# EAGLE board LPS22HB_pcb_pan (EAGLE 8.2.2), part 1 of 3
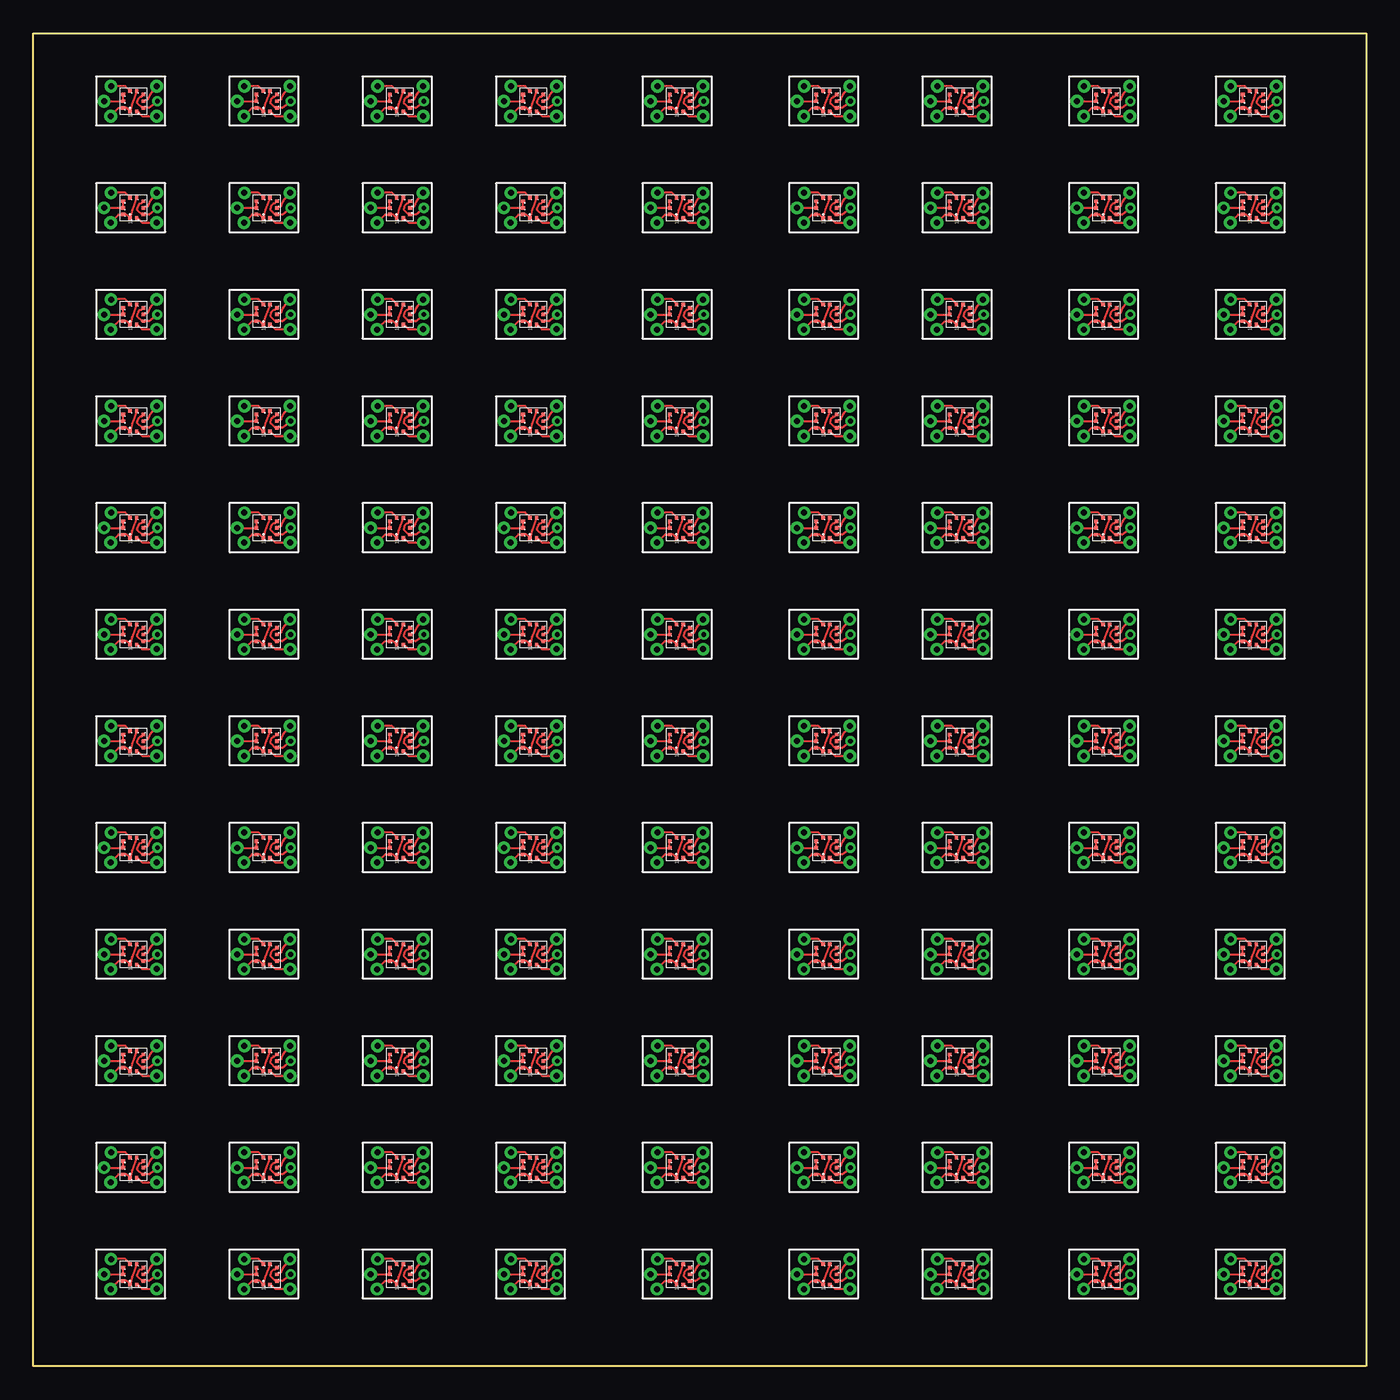
[diagram p0: board, top side]
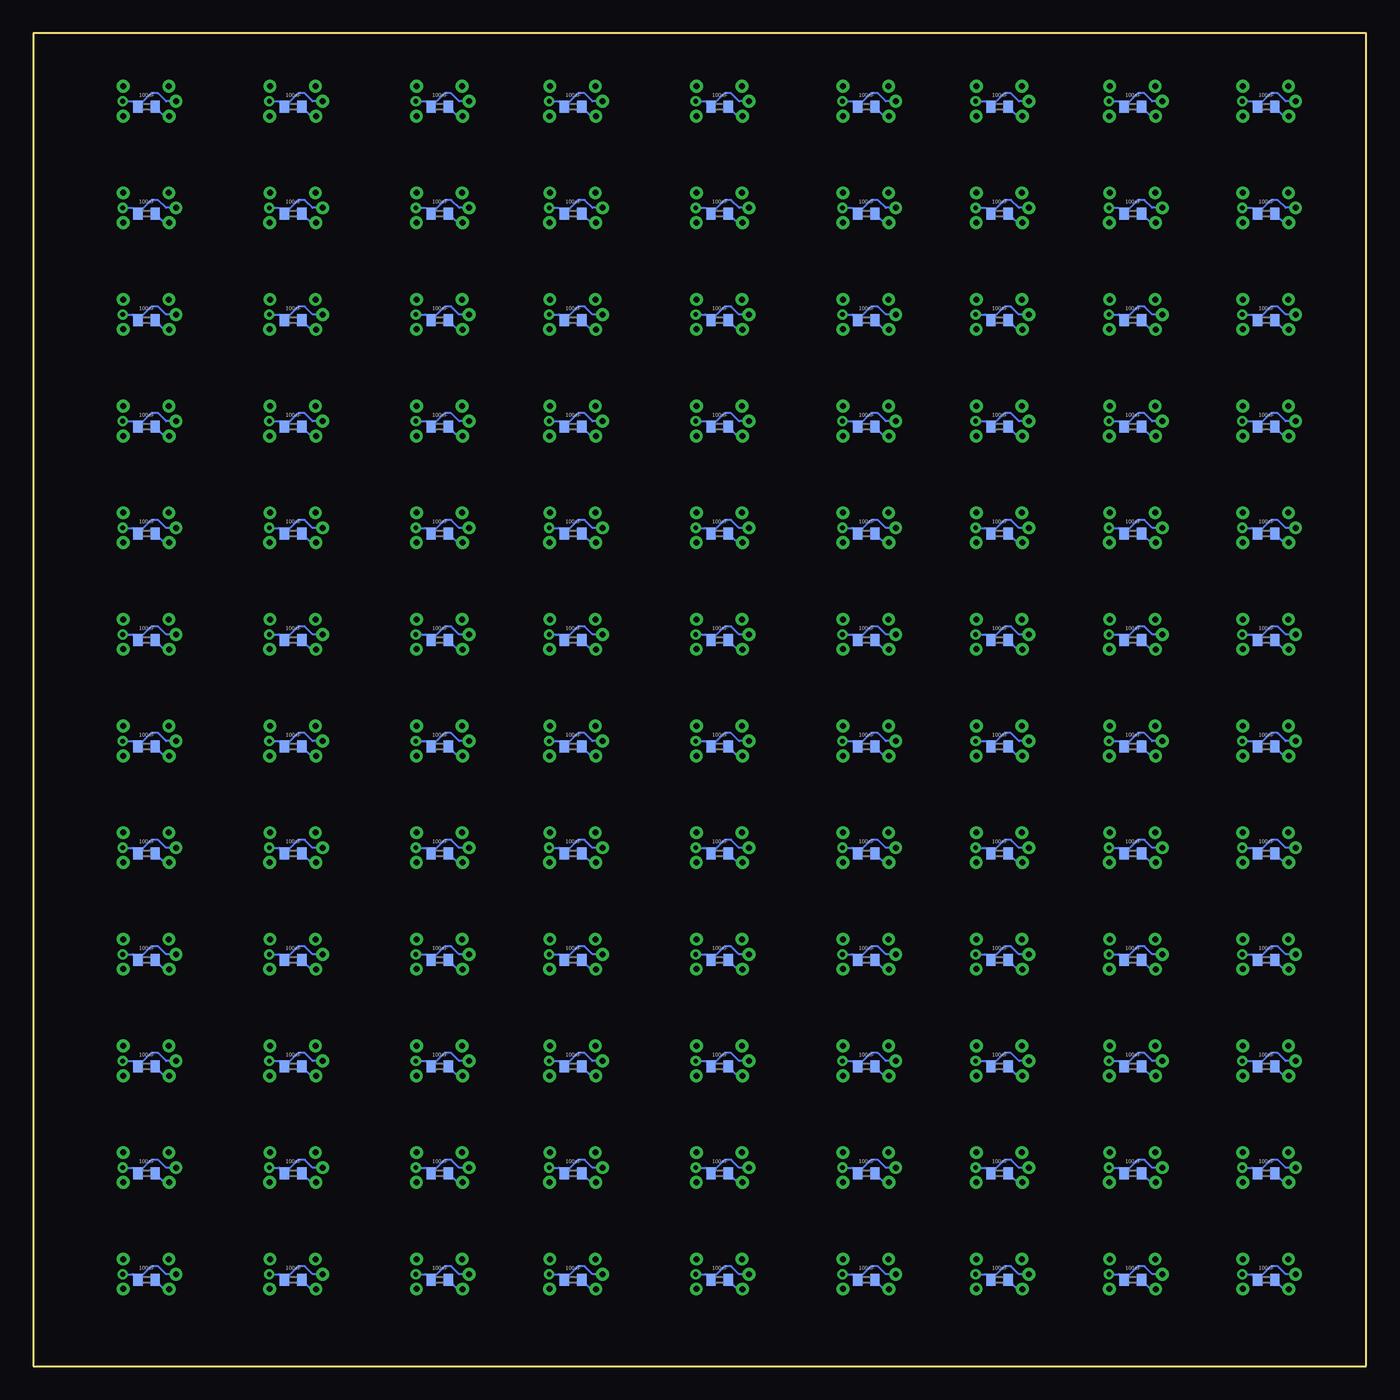
[diagram p1: board, bottom side, seen from below]

Size 100 x 100 mm. Coordinates in mm from the lower left corner, seen from the top.
Outline: 0,0 0,100 100,100 100,0 0,0
Copper layers (1*16): Top 0.035mm / dielectric 1.5mm / Bottom 0.035mm
Design rules "default": minimum track width 6mil, minimum drill 0.35mm, track to track 6mil, track to pad 6mil, pad to pad 6mil, via to via 6mil, smd to smd 6mil, copper to edge 40mil, drill to drill 6mil, minimum pad ring 10mil, minimum via ring 8mil, stop-mask expansion 4mil, vias tented up to drill 0mil, thermal gap 10mil

## Footprints (pad centres in the part's own frame; a part is rotated, then mirrored left to right if it is on the bottom)
C0402 = smd 0.7 x 0.9: 1 -0.65,0; 2 0.65,0
LPS22HB_HLGA = smd 0.275 x 0.25: P$1 0.762,-0.25; P$2 0.762,0.25; P$6 -0.762,0.25; P$7 -0.762,-0.25 | smd 0.25 x 0.275: P$3 0.5,0.762; P$4 0,0.762; P$5 -0.5,0.762; P$8 -0.5,-0.762; P$9 0,-0.762; P$10 0.5,-0.762
WIREPAD_0,8/0,45 = drill 0.45 pad 0.71: P$1 0,0

## Placement (x,y rotation side)
C1  100nF  [C0402]  7.51,14.48 180 bottom
C2  100nF  [C0402]  7.51,6.48 180 bottom
C3  100nF  [C0402]  7.51,22.48 180 bottom
C4  100nF  [C0402]  7.51,30.48 180 bottom
C5  100nF  [C0402]  7.51,38.48 180 bottom
C6  100nF  [C0402]  7.51,46.48 180 bottom
C7  100nF  [C0402]  7.51,54.48 180 bottom
C8  100nF  [C0402]  7.51,62.48 180 bottom
C9  100nF  [C0402]  7.51,70.48 180 bottom
C10  100nF  [C0402]  7.51,78.48 180 bottom
C11  100nF  [C0402]  7.51,86.48 180 bottom
C12  100nF  [C0402]  7.51,94.48 180 bottom
C13  100nF  [C0402]  17.51,6.48 180 bottom
C14  100nF  [C0402]  17.51,14.48 180 bottom
C15  100nF  [C0402]  17.51,22.48 180 bottom
C16  100nF  [C0402]  17.51,30.48 180 bottom
C17  100nF  [C0402]  17.51,38.48 180 bottom
C18  100nF  [C0402]  17.51,46.48 180 bottom
C19  100nF  [C0402]  17.51,54.48 180 bottom
C20  100nF  [C0402]  17.51,62.48 180 bottom
C21  100nF  [C0402]  17.51,70.48 180 bottom
C22  100nF  [C0402]  17.51,78.48 180 bottom
C23  100nF  [C0402]  17.51,86.48 180 bottom
C24  100nF  [C0402]  17.51,94.48 180 bottom
C25  100nF  [C0402]  27.51,6.48 180 bottom
C26  100nF  [C0402]  27.51,14.48 180 bottom
C27  100nF  [C0402]  27.51,22.48 180 bottom
C28  100nF  [C0402]  27.51,30.48 180 bottom
C29  100nF  [C0402]  27.51,38.48 180 bottom
C30  100nF  [C0402]  27.51,46.48 180 bottom
C31  100nF  [C0402]  27.51,54.48 180 bottom
C32  100nF  [C0402]  27.51,62.48 180 bottom
C33  100nF  [C0402]  27.51,70.48 180 bottom
C34  100nF  [C0402]  27.51,78.48 180 bottom
C35  100nF  [C0402]  27.51,86.48 180 bottom
C36  100nF  [C0402]  27.51,94.48 180 bottom
C37  100nF  [C0402]  37.51,6.48 180 bottom
C38  100nF  [C0402]  37.51,14.48 180 bottom
C39  100nF  [C0402]  37.51,22.48 180 bottom
C40  100nF  [C0402]  37.51,30.48 180 bottom
C41  100nF  [C0402]  37.51,38.48 180 bottom
C42  100nF  [C0402]  37.51,46.48 180 bottom
C43  100nF  [C0402]  37.51,54.48 180 bottom
C44  100nF  [C0402]  37.51,62.48 180 bottom
C45  100nF  [C0402]  37.51,70.48 180 bottom
C46  100nF  [C0402]  37.51,78.48 180 bottom
C47  100nF  [C0402]  37.51,86.48 180 bottom
C48  100nF  [C0402]  37.51,94.48 180 bottom
C49  100nF  [C0402]  48.51,6.48 180 bottom
C50  100nF  [C0402]  48.51,14.48 180 bottom
C51  100nF  [C0402]  48.51,22.48 180 bottom
C52  100nF  [C0402]  48.51,30.48 180 bottom
C53  100nF  [C0402]  48.51,38.48 180 bottom
C54  100nF  [C0402]  48.51,46.48 180 bottom
C55  100nF  [C0402]  48.51,54.48 180 bottom
C56  100nF  [C0402]  48.51,62.48 180 bottom
C57  100nF  [C0402]  48.51,70.48 180 bottom
C58  100nF  [C0402]  48.51,78.48 180 bottom
C59  100nF  [C0402]  48.51,86.48 180 bottom
C60  100nF  [C0402]  48.51,94.48 180 bottom
C61  100nF  [C0402]  59.51,6.48 180 bottom
C62  100nF  [C0402]  59.51,14.48 180 bottom
C63  100nF  [C0402]  59.51,22.48 180 bottom
C64  100nF  [C0402]  59.51,30.48 180 bottom
C65  100nF  [C0402]  59.51,38.48 180 bottom
C66  100nF  [C0402]  59.51,46.48 180 bottom
C67  100nF  [C0402]  59.51,54.48 180 bottom
C68  100nF  [C0402]  59.51,62.48 180 bottom
C69  100nF  [C0402]  59.51,70.48 180 bottom
C70  100nF  [C0402]  59.51,78.48 180 bottom
C71  100nF  [C0402]  59.51,86.48 180 bottom
C72  100nF  [C0402]  59.51,94.48 180 bottom
C73  100nF  [C0402]  69.51,6.48 180 bottom
C74  100nF  [C0402]  69.51,14.48 180 bottom
C75  100nF  [C0402]  69.51,22.48 180 bottom
C76  100nF  [C0402]  69.51,30.48 180 bottom
C77  100nF  [C0402]  69.51,38.48 180 bottom
C78  100nF  [C0402]  69.51,46.48 180 bottom
C79  100nF  [C0402]  69.51,54.48 180 bottom
C80  100nF  [C0402]  69.51,62.48 180 bottom
C81  100nF  [C0402]  69.51,70.48 180 bottom
C82  100nF  [C0402]  69.51,78.48 180 bottom
C83  100nF  [C0402]  69.51,86.48 180 bottom
C84  100nF  [C0402]  69.51,94.48 180 bottom
C85  100nF  [C0402]  80.51,6.48 180 bottom
C86  100nF  [C0402]  80.51,14.48 180 bottom
C87  100nF  [C0402]  80.51,22.48 180 bottom
C88  100nF  [C0402]  80.51,30.48 180 bottom
C89  100nF  [C0402]  80.51,38.48 180 bottom
C90  100nF  [C0402]  80.51,46.48 180 bottom
C91  100nF  [C0402]  80.51,54.48 180 bottom
C92  100nF  [C0402]  80.51,62.48 180 bottom
C93  100nF  [C0402]  80.51,70.48 180 bottom
C94  100nF  [C0402]  80.51,78.48 180 bottom
C95  100nF  [C0402]  80.51,86.48 180 bottom
C96  100nF  [C0402]  80.51,94.48 180 bottom
C97  100nF  [C0402]  91.51,6.48 180 bottom
C98  100nF  [C0402]  91.51,14.48 180 bottom
C99  100nF  [C0402]  91.51,22.48 180 bottom
C100  100nF  [C0402]  91.51,30.48 180 bottom
C101  100nF  [C0402]  91.51,38.48 180 bottom
C102  100nF  [C0402]  91.51,46.48 180 bottom
C103  100nF  [C0402]  91.51,54.48 180 bottom
C104  100nF  [C0402]  91.51,62.48 180 bottom
C105  100nF  [C0402]  91.51,70.48 180 bottom
C106  100nF  [C0402]  91.51,78.48 180 bottom
C107  100nF  [C0402]  91.51,86.48 180 bottom
C108  100nF  [C0402]  91.51,94.48 180 bottom
U$1  LPS22HB_HLGA  [LPS22HB_HLGA]  7.5,6.9 270 top
U$2  WIREPAD_0,8/0,45  [WIREPAD_0,8/0,45]  9.26,5.79 90 top
U$3  WIREPAD_0,8/0,45  [WIREPAD_0,8/0,45]  9.25,8.03 90 top
U$4  WIREPAD_0,8/0,45  [WIREPAD_0,8/0,45]  9.26,13.79 90 top
U$5  WIREPAD_0,8/0,45  [WIREPAD_0,8/0,45]  9.25,16.03 90 top
U$6  WIREPAD_0,8/0,45  [WIREPAD_0,8/0,45]  5.83,8.03 90 top
U$7  WIREPAD_0,8/0,45  [WIREPAD_0,8/0,45]  5.3,6.9 90 top
U$8  WIREPAD_0,8/0,45  [WIREPAD_0,8/0,45]  5.8,5.79 90 top
U$9  WIREPAD_0,8/0,45  [WIREPAD_0,8/0,45]  5.83,16.03 90 top
U$10  WIREPAD_0,8/0,45  [WIREPAD_0,8/0,45]  5.3,14.9 90 top
U$11  WIREPAD_0,8/0,45  [WIREPAD_0,8/0,45]  5.8,13.79 90 top
U$12  LPS22HB_HLGA  [LPS22HB_HLGA]  7.5,14.9 270 top
U$13  WIREPAD_0,8/0,45  [WIREPAD_0,8/0,45]  9.26,21.79 90 top
U$14  WIREPAD_0,8/0,45  [WIREPAD_0,8/0,45]  9.25,24.03 90 top
U$15  WIREPAD_0,8/0,45  [WIREPAD_0,8/0,45]  5.83,24.03 90 top
U$16  WIREPAD_0,8/0,45  [WIREPAD_0,8/0,45]  5.3,22.9 90 top
U$17  WIREPAD_0,8/0,45  [WIREPAD_0,8/0,45]  5.8,21.79 90 top
U$18  LPS22HB_HLGA  [LPS22HB_HLGA]  7.5,22.9 270 top
U$19  WIREPAD_0,8/0,45  [WIREPAD_0,8/0,45]  9.26,29.79 90 top
U$20  WIREPAD_0,8/0,45  [WIREPAD_0,8/0,45]  9.25,32.03 90 top
U$21  WIREPAD_0,8/0,45  [WIREPAD_0,8/0,45]  5.83,32.03 90 top
U$22  WIREPAD_0,8/0,45  [WIREPAD_0,8/0,45]  5.3,30.9 90 top
U$23  WIREPAD_0,8/0,45  [WIREPAD_0,8/0,45]  5.8,29.79 90 top
U$24  LPS22HB_HLGA  [LPS22HB_HLGA]  7.5,30.9 270 top
U$25  WIREPAD_0,8/0,45  [WIREPAD_0,8/0,45]  9.26,37.79 90 top
U$26  WIREPAD_0,8/0,45  [WIREPAD_0,8/0,45]  9.25,40.03 90 top
U$27  WIREPAD_0,8/0,45  [WIREPAD_0,8/0,45]  5.83,40.03 90 top
U$28  WIREPAD_0,8/0,45  [WIREPAD_0,8/0,45]  5.3,38.9 90 top
U$29  WIREPAD_0,8/0,45  [WIREPAD_0,8/0,45]  5.8,37.78 90 top
U$30  LPS22HB_HLGA  [LPS22HB_HLGA]  7.5,38.9 270 top
U$31  WIREPAD_0,8/0,45  [WIREPAD_0,8/0,45]  9.26,45.79 90 top
U$32  WIREPAD_0,8/0,45  [WIREPAD_0,8/0,45]  9.25,48.03 90 top
U$33  WIREPAD_0,8/0,45  [WIREPAD_0,8/0,45]  5.83,48.03 90 top
U$34  WIREPAD_0,8/0,45  [WIREPAD_0,8/0,45]  5.3,46.9 90 top
U$35  WIREPAD_0,8/0,45  [WIREPAD_0,8/0,45]  5.8,45.78 90 top
U$36  LPS22HB_HLGA  [LPS22HB_HLGA]  7.5,46.9 270 top
U$37  WIREPAD_0,8/0,45  [WIREPAD_0,8/0,45]  9.26,53.79 90 top
U$38  WIREPAD_0,8/0,45  [WIREPAD_0,8/0,45]  9.25,56.03 90 top
U$39  WIREPAD_0,8/0,45  [WIREPAD_0,8/0,45]  5.83,56.03 90 top
U$40  WIREPAD_0,8/0,45  [WIREPAD_0,8/0,45]  5.3,54.9 90 top
U$41  WIREPAD_0,8/0,45  [WIREPAD_0,8/0,45]  5.8,53.78 90 top
U$42  LPS22HB_HLGA  [LPS22HB_HLGA]  7.5,54.9 270 top
U$43  WIREPAD_0,8/0,45  [WIREPAD_0,8/0,45]  9.26,61.79 90 top
U$44  WIREPAD_0,8/0,45  [WIREPAD_0,8/0,45]  9.25,64.03 90 top
U$45  WIREPAD_0,8/0,45  [WIREPAD_0,8/0,45]  5.83,64.03 90 top
U$46  WIREPAD_0,8/0,45  [WIREPAD_0,8/0,45]  5.3,62.9 90 top
U$47  WIREPAD_0,8/0,45  [WIREPAD_0,8/0,45]  5.8,61.78 90 top
U$48  LPS22HB_HLGA  [LPS22HB_HLGA]  7.5,62.9 270 top
U$49  WIREPAD_0,8/0,45  [WIREPAD_0,8/0,45]  9.26,69.79 90 top
U$50  WIREPAD_0,8/0,45  [WIREPAD_0,8/0,45]  9.25,72.03 90 top
U$51  WIREPAD_0,8/0,45  [WIREPAD_0,8/0,45]  5.83,72.03 90 top
U$52  WIREPAD_0,8/0,45  [WIREPAD_0,8/0,45]  5.3,70.9 90 top
U$53  WIREPAD_0,8/0,45  [WIREPAD_0,8/0,45]  5.8,69.78 90 top
U$54  LPS22HB_HLGA  [LPS22HB_HLGA]  7.5,70.9 270 top
U$55  WIREPAD_0,8/0,45  [WIREPAD_0,8/0,45]  9.26,77.79 90 top
U$56  WIREPAD_0,8/0,45  [WIREPAD_0,8/0,45]  9.25,80.03 90 top
U$57  WIREPAD_0,8/0,45  [WIREPAD_0,8/0,45]  5.83,80.03 90 top
U$58  WIREPAD_0,8/0,45  [WIREPAD_0,8/0,45]  5.3,78.9 90 top
U$59  WIREPAD_0,8/0,45  [WIREPAD_0,8/0,45]  5.8,77.78 90 top
U$60  LPS22HB_HLGA  [LPS22HB_HLGA]  7.5,78.9 270 top
U$61  WIREPAD_0,8/0,45  [WIREPAD_0,8/0,45]  9.26,85.79 90 top
U$62  WIREPAD_0,8/0,45  [WIREPAD_0,8/0,45]  9.25,88.03 90 top
U$63  WIREPAD_0,8/0,45  [WIREPAD_0,8/0,45]  5.83,88.03 90 top
U$64  WIREPAD_0,8/0,45  [WIREPAD_0,8/0,45]  5.3,86.9 90 top
U$65  WIREPAD_0,8/0,45  [WIREPAD_0,8/0,45]  5.8,85.78 90 top
U$66  LPS22HB_HLGA  [LPS22HB_HLGA]  7.5,86.9 270 top
U$67  WIREPAD_0,8/0,45  [WIREPAD_0,8/0,45]  9.26,93.79 90 top
U$68  WIREPAD_0,8/0,45  [WIREPAD_0,8/0,45]  9.25,96.03 90 top
U$69  WIREPAD_0,8/0,45  [WIREPAD_0,8/0,45]  5.83,96.03 90 top
U$70  WIREPAD_0,8/0,45  [WIREPAD_0,8/0,45]  5.3,94.9 90 top
U$71  WIREPAD_0,8/0,45  [WIREPAD_0,8/0,45]  5.8,93.78 90 top
U$72  LPS22HB_HLGA  [LPS22HB_HLGA]  7.5,94.9 270 top
U$73  WIREPAD_0,8/0,45  [WIREPAD_0,8/0,45]  19.26,5.79 90 top
U$74  WIREPAD_0,8/0,45  [WIREPAD_0,8/0,45]  19.25,8.03 90 top
U$75  WIREPAD_0,8/0,45  [WIREPAD_0,8/0,45]  15.83,8.03 90 top
U$76  WIREPAD_0,8/0,45  [WIREPAD_0,8/0,45]  15.3,6.9 90 top
U$77  WIREPAD_0,8/0,45  [WIREPAD_0,8/0,45]  15.8,5.79 90 top
U$78  LPS22HB_HLGA  [LPS22HB_HLGA]  17.5,6.9 270 top
U$79  WIREPAD_0,8/0,45  [WIREPAD_0,8/0,45]  19.26,13.79 90 top
U$80  WIREPAD_0,8/0,45  [WIREPAD_0,8/0,45]  19.25,16.03 90 top
U$81  WIREPAD_0,8/0,45  [WIREPAD_0,8/0,45]  15.83,16.03 90 top
U$82  WIREPAD_0,8/0,45  [WIREPAD_0,8/0,45]  15.3,14.9 90 top
U$83  WIREPAD_0,8/0,45  [WIREPAD_0,8/0,45]  15.8,13.79 90 top
U$84  LPS22HB_HLGA  [LPS22HB_HLGA]  17.5,14.9 270 top
U$85  WIREPAD_0,8/0,45  [WIREPAD_0,8/0,45]  19.26,21.79 90 top
U$86  WIREPAD_0,8/0,45  [WIREPAD_0,8/0,45]  19.25,24.03 90 top
U$87  WIREPAD_0,8/0,45  [WIREPAD_0,8/0,45]  15.83,24.03 90 top
U$88  WIREPAD_0,8/0,45  [WIREPAD_0,8/0,45]  15.3,22.9 90 top
U$89  WIREPAD_0,8/0,45  [WIREPAD_0,8/0,45]  15.8,21.79 90 top
U$90  LPS22HB_HLGA  [LPS22HB_HLGA]  17.5,22.9 270 top
U$91  WIREPAD_0,8/0,45  [WIREPAD_0,8/0,45]  19.26,29.79 90 top
U$92  WIREPAD_0,8/0,45  [WIREPAD_0,8/0,45]  19.25,32.03 90 top
U$93  WIREPAD_0,8/0,45  [WIREPAD_0,8/0,45]  15.83,32.03 90 top
U$94  WIREPAD_0,8/0,45  [WIREPAD_0,8/0,45]  15.3,30.9 90 top
U$95  WIREPAD_0,8/0,45  [WIREPAD_0,8/0,45]  15.8,29.79 90 top
U$96  LPS22HB_HLGA  [LPS22HB_HLGA]  17.5,30.9 270 top
U$97  WIREPAD_0,8/0,45  [WIREPAD_0,8/0,45]  19.26,37.79 90 top
U$98  WIREPAD_0,8/0,45  [WIREPAD_0,8/0,45]  19.25,40.03 90 top
U$99  WIREPAD_0,8/0,45  [WIREPAD_0,8/0,45]  15.83,40.03 90 top
U$100  WIREPAD_0,8/0,45  [WIREPAD_0,8/0,45]  15.3,38.9 90 top
U$101  WIREPAD_0,8/0,45  [WIREPAD_0,8/0,45]  15.8,37.78 90 top
U$102  LPS22HB_HLGA  [LPS22HB_HLGA]  17.5,38.9 270 top
U$103  WIREPAD_0,8/0,45  [WIREPAD_0,8/0,45]  19.26,45.79 90 top
U$104  WIREPAD_0,8/0,45  [WIREPAD_0,8/0,45]  19.25,48.03 90 top
U$105  WIREPAD_0,8/0,45  [WIREPAD_0,8/0,45]  15.83,48.03 90 top
U$106  WIREPAD_0,8/0,45  [WIREPAD_0,8/0,45]  15.3,46.9 90 top
U$107  WIREPAD_0,8/0,45  [WIREPAD_0,8/0,45]  15.8,45.78 90 top
U$108  LPS22HB_HLGA  [LPS22HB_HLGA]  17.5,46.9 270 top
U$109  WIREPAD_0,8/0,45  [WIREPAD_0,8/0,45]  19.26,53.79 90 top
U$110  WIREPAD_0,8/0,45  [WIREPAD_0,8/0,45]  19.25,56.03 90 top
U$111  WIREPAD_0,8/0,45  [WIREPAD_0,8/0,45]  15.83,56.03 90 top
U$112  WIREPAD_0,8/0,45  [WIREPAD_0,8/0,45]  15.3,54.9 90 top
U$113  WIREPAD_0,8/0,45  [WIREPAD_0,8/0,45]  15.8,53.78 90 top
U$114  LPS22HB_HLGA  [LPS22HB_HLGA]  17.5,54.9 270 top
U$115  WIREPAD_0,8/0,45  [WIREPAD_0,8/0,45]  19.26,61.79 90 top
U$116  WIREPAD_0,8/0,45  [WIREPAD_0,8/0,45]  19.25,64.03 90 top
U$117  WIREPAD_0,8/0,45  [WIREPAD_0,8/0,45]  15.83,64.03 90 top
U$118  WIREPAD_0,8/0,45  [WIREPAD_0,8/0,45]  15.3,62.9 90 top
U$119  WIREPAD_0,8/0,45  [WIREPAD_0,8/0,45]  15.8,61.78 90 top
U$120  LPS22HB_HLGA  [LPS22HB_HLGA]  17.5,62.9 270 top
U$121  WIREPAD_0,8/0,45  [WIREPAD_0,8/0,45]  19.26,69.79 90 top
U$122  WIREPAD_0,8/0,45  [WIREPAD_0,8/0,45]  19.25,72.03 90 top
U$123  WIREPAD_0,8/0,45  [WIREPAD_0,8/0,45]  15.83,72.03 90 top
U$124  WIREPAD_0,8/0,45  [WIREPAD_0,8/0,45]  15.3,70.9 90 top
U$125  WIREPAD_0,8/0,45  [WIREPAD_0,8/0,45]  15.8,69.78 90 top
U$126  LPS22HB_HLGA  [LPS22HB_HLGA]  17.5,70.9 270 top
U$127  WIREPAD_0,8/0,45  [WIREPAD_0,8/0,45]  19.26,77.79 90 top
U$128  WIREPAD_0,8/0,45  [WIREPAD_0,8/0,45]  19.25,80.03 90 top
U$129  WIREPAD_0,8/0,45  [WIREPAD_0,8/0,45]  15.83,80.03 90 top
U$130  WIREPAD_0,8/0,45  [WIREPAD_0,8/0,45]  15.3,78.9 90 top
U$131  WIREPAD_0,8/0,45  [WIREPAD_0,8/0,45]  15.8,77.78 90 top
U$132  LPS22HB_HLGA  [LPS22HB_HLGA]  17.5,78.9 270 top
U$133  WIREPAD_0,8/0,45  [WIREPAD_0,8/0,45]  19.26,85.79 90 top
U$134  WIREPAD_0,8/0,45  [WIREPAD_0,8/0,45]  19.25,88.03 90 top
U$135  WIREPAD_0,8/0,45  [WIREPAD_0,8/0,45]  15.83,88.03 90 top
U$136  WIREPAD_0,8/0,45  [WIREPAD_0,8/0,45]  15.3,86.9 90 top
U$137  WIREPAD_0,8/0,45  [WIREPAD_0,8/0,45]  15.8,85.78 90 top
U$138  LPS22HB_HLGA  [LPS22HB_HLGA]  17.5,86.9 270 top
U$139  WIREPAD_0,8/0,45  [WIREPAD_0,8/0,45]  19.26,93.79 90 top
U$140  WIREPAD_0,8/0,45  [WIREPAD_0,8/0,45]  19.25,96.03 90 top
U$141  WIREPAD_0,8/0,45  [WIREPAD_0,8/0,45]  15.83,96.03 90 top
U$142  WIREPAD_0,8/0,45  [WIREPAD_0,8/0,45]  15.3,94.9 90 top
U$143  WIREPAD_0,8/0,45  [WIREPAD_0,8/0,45]  15.8,93.78 90 top
U$144  LPS22HB_HLGA  [LPS22HB_HLGA]  17.5,94.9 270 top
U$145  WIREPAD_0,8/0,45  [WIREPAD_0,8/0,45]  29.26,5.79 90 top
U$146  WIREPAD_0,8/0,45  [WIREPAD_0,8/0,45]  29.25,8.03 90 top
U$147  WIREPAD_0,8/0,45  [WIREPAD_0,8/0,45]  25.83,8.03 90 top
U$148  WIREPAD_0,8/0,45  [WIREPAD_0,8/0,45]  25.3,6.9 90 top
U$149  WIREPAD_0,8/0,45  [WIREPAD_0,8/0,45]  25.8,5.79 90 top
U$150  LPS22HB_HLGA  [LPS22HB_HLGA]  27.5,6.9 270 top
U$151  WIREPAD_0,8/0,45  [WIREPAD_0,8/0,45]  29.26,13.79 90 top
U$152  WIREPAD_0,8/0,45  [WIREPAD_0,8/0,45]  29.25,16.03 90 top
U$153  WIREPAD_0,8/0,45  [WIREPAD_0,8/0,45]  25.83,16.03 90 top
U$154  WIREPAD_0,8/0,45  [WIREPAD_0,8/0,45]  25.3,14.9 90 top
U$155  WIREPAD_0,8/0,45  [WIREPAD_0,8/0,45]  25.8,13.79 90 top
U$156  LPS22HB_HLGA  [LPS22HB_HLGA]  27.5,14.9 270 top
U$157  WIREPAD_0,8/0,45  [WIREPAD_0,8/0,45]  29.26,21.79 90 top
U$158  WIREPAD_0,8/0,45  [WIREPAD_0,8/0,45]  29.25,24.03 90 top
U$159  WIREPAD_0,8/0,45  [WIREPAD_0,8/0,45]  25.83,24.03 90 top
U$160  WIREPAD_0,8/0,45  [WIREPAD_0,8/0,45]  25.3,22.9 90 top
U$161  WIREPAD_0,8/0,45  [WIREPAD_0,8/0,45]  25.8,21.79 90 top
U$162  LPS22HB_HLGA  [LPS22HB_HLGA]  27.5,22.9 270 top
U$163  WIREPAD_0,8/0,45  [WIREPAD_0,8/0,45]  29.26,29.79 90 top
U$164  WIREPAD_0,8/0,45  [WIREPAD_0,8/0,45]  29.25,32.03 90 top
U$165  WIREPAD_0,8/0,45  [WIREPAD_0,8/0,45]  25.83,32.03 90 top
U$166  WIREPAD_0,8/0,45  [WIREPAD_0,8/0,45]  25.3,30.9 90 top
U$167  WIREPAD_0,8/0,45  [WIREPAD_0,8/0,45]  25.8,29.79 90 top
U$168  LPS22HB_HLGA  [LPS22HB_HLGA]  27.5,30.9 270 top
U$169  WIREPAD_0,8/0,45  [WIREPAD_0,8/0,45]  29.26,37.79 90 top
U$170  WIREPAD_0,8/0,45  [WIREPAD_0,8/0,45]  29.25,40.03 90 top
U$171  WIREPAD_0,8/0,45  [WIREPAD_0,8/0,45]  25.83,40.03 90 top
U$172  WIREPAD_0,8/0,45  [WIREPAD_0,8/0,45]  25.3,38.9 90 top
U$173  WIREPAD_0,8/0,45  [WIREPAD_0,8/0,45]  25.8,37.78 90 top
U$174  LPS22HB_HLGA  [LPS22HB_HLGA]  27.5,38.9 270 top
U$175  WIREPAD_0,8/0,45  [WIREPAD_0,8/0,45]  29.26,45.79 90 top
U$176  WIREPAD_0,8/0,45  [WIREPAD_0,8/0,45]  29.25,48.03 90 top
U$177  WIREPAD_0,8/0,45  [WIREPAD_0,8/0,45]  25.83,48.03 90 top
U$178  WIREPAD_0,8/0,45  [WIREPAD_0,8/0,45]  25.3,46.9 90 top
U$179  WIREPAD_0,8/0,45  [WIREPAD_0,8/0,45]  25.8,45.78 90 top
U$180  LPS22HB_HLGA  [LPS22HB_HLGA]  27.5,46.9 270 top
U$181  WIREPAD_0,8/0,45  [WIREPAD_0,8/0,45]  29.26,53.79 90 top
U$182  WIREPAD_0,8/0,45  [WIREPAD_0,8/0,45]  29.25,56.03 90 top
U$183  WIREPAD_0,8/0,45  [WIREPAD_0,8/0,45]  25.83,56.03 90 top
U$184  WIREPAD_0,8/0,45  [WIREPAD_0,8/0,45]  25.3,54.9 90 top
U$185  WIREPAD_0,8/0,45  [WIREPAD_0,8/0,45]  25.8,53.78 90 top
U$186  LPS22HB_HLGA  [LPS22HB_HLGA]  27.5,54.9 270 top
U$187  WIREPAD_0,8/0,45  [WIREPAD_0,8/0,45]  29.26,61.79 90 top
U$188  WIREPAD_0,8/0,45  [WIREPAD_0,8/0,45]  29.25,64.03 90 top
U$189  WIREPAD_0,8/0,45  [WIREPAD_0,8/0,45]  25.83,64.03 90 top
U$190  WIREPAD_0,8/0,45  [WIREPAD_0,8/0,45]  25.3,62.9 90 top
U$191  WIREPAD_0,8/0,45  [WIREPAD_0,8/0,45]  25.8,61.78 90 top
U$192  LPS22HB_HLGA  [LPS22HB_HLGA]  27.5,62.9 270 top
U$193  WIREPAD_0,8/0,45  [WIREPAD_0,8/0,45]  29.26,69.79 90 top
U$194  WIREPAD_0,8/0,45  [WIREPAD_0,8/0,45]  29.25,72.03 90 top
U$195  WIREPAD_0,8/0,45  [WIREPAD_0,8/0,45]  25.83,72.03 90 top
U$196  WIREPAD_0,8/0,45  [WIREPAD_0,8/0,45]  25.3,70.9 90 top
U$197  WIREPAD_0,8/0,45  [WIREPAD_0,8/0,45]  25.8,69.78 90 top
U$198  LPS22HB_HLGA  [LPS22HB_HLGA]  27.5,70.9 270 top
U$199  WIREPAD_0,8/0,45  [WIREPAD_0,8/0,45]  29.26,77.79 90 top
U$200  WIREPAD_0,8/0,45  [WIREPAD_0,8/0,45]  29.25,80.03 90 top
U$201  WIREPAD_0,8/0,45  [WIREPAD_0,8/0,45]  25.83,80.03 90 top
U$202  WIREPAD_0,8/0,45  [WIREPAD_0,8/0,45]  25.3,78.9 90 top
U$203  WIREPAD_0,8/0,45  [WIREPAD_0,8/0,45]  25.8,77.78 90 top
U$204  LPS22HB_HLGA  [LPS22HB_HLGA]  27.5,78.9 270 top
U$205  WIREPAD_0,8/0,45  [WIREPAD_0,8/0,45]  29.26,85.79 90 top
U$206  WIREPAD_0,8/0,45  [WIREPAD_0,8/0,45]  29.25,88.03 90 top
U$207  WIREPAD_0,8/0,45  [WIREPAD_0,8/0,45]  25.83,88.03 90 top
U$208  WIREPAD_0,8/0,45  [WIREPAD_0,8/0,45]  25.3,86.9 90 top
U$209  WIREPAD_0,8/0,45  [WIREPAD_0,8/0,45]  25.8,85.78 90 top
U$210  LPS22HB_HLGA  [LPS22HB_HLGA]  27.5,86.9 270 top
U$211  WIREPAD_0,8/0,45  [WIREPAD_0,8/0,45]  29.26,93.79 90 top
U$212  WIREPAD_0,8/0,45  [WIREPAD_0,8/0,45]  29.25,96.03 90 top
U$213  WIREPAD_0,8/0,45  [WIREPAD_0,8/0,45]  25.83,96.03 90 top
U$214  WIREPAD_0,8/0,45  [WIREPAD_0,8/0,45]  25.3,94.9 90 top
U$215  WIREPAD_0,8/0,45  [WIREPAD_0,8/0,45]  25.8,93.78 90 top
U$216  LPS22HB_HLGA  [LPS22HB_HLGA]  27.5,94.9 270 top
U$217  WIREPAD_0,8/0,45  [WIREPAD_0,8/0,45]  39.26,5.79 90 top
U$218  WIREPAD_0,8/0,45  [WIREPAD_0,8/0,45]  39.25,8.03 90 top
U$219  WIREPAD_0,8/0,45  [WIREPAD_0,8/0,45]  35.83,8.03 90 top
U$220  WIREPAD_0,8/0,45  [WIREPAD_0,8/0,45]  35.3,6.9 90 top
U$221  WIREPAD_0,8/0,45  [WIREPAD_0,8/0,45]  35.8,5.79 90 top
U$222  LPS22HB_HLGA  [LPS22HB_HLGA]  37.5,6.9 270 top
U$223  WIREPAD_0,8/0,45  [WIREPAD_0,8/0,45]  39.26,13.79 90 top
U$224  WIREPAD_0,8/0,45  [WIREPAD_0,8/0,45]  39.25,16.03 90 top
U$225  WIREPAD_0,8/0,45  [WIREPAD_0,8/0,45]  35.83,16.03 90 top
U$226  WIREPAD_0,8/0,45  [WIREPAD_0,8/0,45]  35.3,14.9 90 top
U$227  WIREPAD_0,8/0,45  [WIREPAD_0,8/0,45]  35.8,13.79 90 top
U$228  LPS22HB_HLGA  [LPS22HB_HLGA]  37.5,14.9 270 top
U$229  WIREPAD_0,8/0,45  [WIREPAD_0,8/0,45]  39.26,21.79 90 top
U$230  WIREPAD_0,8/0,45  [WIREPAD_0,8/0,45]  39.25,24.03 90 top
U$231  WIREPAD_0,8/0,45  [WIREPAD_0,8/0,45]  35.83,24.03 90 top
U$232  WIREPAD_0,8/0,45  [WIREPAD_0,8/0,45]  35.3,22.9 90 top
U$233  WIREPAD_0,8/0,45  [WIREPAD_0,8/0,45]  35.8,21.79 90 top
U$234  LPS22HB_HLGA  [LPS22HB_HLGA]  37.5,22.9 270 top
U$235  WIREPAD_0,8/0,45  [WIREPAD_0,8/0,45]  39.26,29.79 90 top
U$236  WIREPAD_0,8/0,45  [WIREPAD_0,8/0,45]  39.25,32.03 90 top
U$237  WIREPAD_0,8/0,45  [WIREPAD_0,8/0,45]  35.83,32.03 90 top
U$238  WIREPAD_0,8/0,45  [WIREPAD_0,8/0,45]  35.3,30.9 90 top
U$239  WIREPAD_0,8/0,45  [WIREPAD_0,8/0,45]  35.8,29.79 90 top
U$240  LPS22HB_HLGA  [LPS22HB_HLGA]  37.5,30.9 270 top
U$241  WIREPAD_0,8/0,45  [WIREPAD_0,8/0,45]  39.26,37.79 90 top
U$242  WIREPAD_0,8/0,45  [WIREPAD_0,8/0,45]  39.25,40.03 90 top
U$243  WIREPAD_0,8/0,45  [WIREPAD_0,8/0,45]  35.83,40.03 90 top
U$244  WIREPAD_0,8/0,45  [WIREPAD_0,8/0,45]  35.3,38.9 90 top
U$245  WIREPAD_0,8/0,45  [WIREPAD_0,8/0,45]  35.8,37.78 90 top
U$246  LPS22HB_HLGA  [LPS22HB_HLGA]  37.5,38.9 270 top
U$247  WIREPAD_0,8/0,45  [WIREPAD_0,8/0,45]  39.26,45.79 90 top
U$248  WIREPAD_0,8/0,45  [WIREPAD_0,8/0,45]  39.25,48.03 90 top
U$249  WIREPAD_0,8/0,45  [WIREPAD_0,8/0,45]  35.83,48.03 90 top
U$250  WIREPAD_0,8/0,45  [WIREPAD_0,8/0,45]  35.3,46.9 90 top
U$251  WIREPAD_0,8/0,45  [WIREPAD_0,8/0,45]  35.8,45.78 90 top
U$252  LPS22HB_HLGA  [LPS22HB_HLGA]  37.5,46.9 270 top
U$253  WIREPAD_0,8/0,45  [WIREPAD_0,8/0,45]  39.26,53.79 90 top
U$254  WIREPAD_0,8/0,45  [WIREPAD_0,8/0,45]  39.25,56.03 90 top
U$255  WIREPAD_0,8/0,45  [WIREPAD_0,8/0,45]  35.83,56.03 90 top
U$256  WIREPAD_0,8/0,45  [WIREPAD_0,8/0,45]  35.3,54.9 90 top
U$257  WIREPAD_0,8/0,45  [WIREPAD_0,8/0,45]  35.8,53.78 90 top
U$258  LPS22HB_HLGA  [LPS22HB_HLGA]  37.5,54.9 270 top
U$259  WIREPAD_0,8/0,45  [WIREPAD_0,8/0,45]  39.26,61.79 90 top
U$260  WIREPAD_0,8/0,45  [WIREPAD_0,8/0,45]  39.25,64.03 90 top
U$261  WIREPAD_0,8/0,45  [WIREPAD_0,8/0,45]  35.83,64.03 90 top
U$262  WIREPAD_0,8/0,45  [WIREPAD_0,8/0,45]  35.3,62.9 90 top
U$263  WIREPAD_0,8/0,45  [WIREPAD_0,8/0,45]  35.8,61.78 90 top
U$264  LPS22HB_HLGA  [LPS22HB_HLGA]  37.5,62.9 270 top
U$265  WIREPAD_0,8/0,45  [WIREPAD_0,8/0,45]  39.26,69.79 90 top
U$266  WIREPAD_0,8/0,45  [WIREPAD_0,8/0,45]  39.25,72.03 90 top
U$267  WIREPAD_0,8/0,45  [WIREPAD_0,8/0,45]  35.83,72.03 90 top
U$268  WIREPAD_0,8/0,45  [WIREPAD_0,8/0,45]  35.3,70.9 90 top
U$269  WIREPAD_0,8/0,45  [WIREPAD_0,8/0,45]  35.8,69.78 90 top
U$270  LPS22HB_HLGA  [LPS22HB_HLGA]  37.5,70.9 270 top
U$271  WIREPAD_0,8/0,45  [WIREPAD_0,8/0,45]  39.26,77.79 90 top
U$272  WIREPAD_0,8/0,45  [WIREPAD_0,8/0,45]  39.25,80.03 90 top
U$273  WIREPAD_0,8/0,45  [WIREPAD_0,8/0,45]  35.83,80.03 90 top
U$274  WIREPAD_0,8/0,45  [WIREPAD_0,8/0,45]  35.3,78.9 90 top
U$275  WIREPAD_0,8/0,45  [WIREPAD_0,8/0,45]  35.8,77.78 90 top
U$276  LPS22HB_HLGA  [LPS22HB_HLGA]  37.5,78.9 270 top
U$277  WIREPAD_0,8/0,45  [WIREPAD_0,8/0,45]  39.26,85.79 90 top
U$278  WIREPAD_0,8/0,45  [WIREPAD_0,8/0,45]  39.25,88.03 90 top
U$279  WIREPAD_0,8/0,45  [WIREPAD_0,8/0,45]  35.83,88.03 90 top
U$280  WIREPAD_0,8/0,45  [WIREPAD_0,8/0,45]  35.3,86.9 90 top
U$281  WIREPAD_0,8/0,45  [WIREPAD_0,8/0,45]  35.8,85.78 90 top
U$282  LPS22HB_HLGA  [LPS22HB_HLGA]  37.5,86.9 270 top
U$283  WIREPAD_0,8/0,45  [WIREPAD_0,8/0,45]  39.26,93.79 90 top
U$284  WIREPAD_0,8/0,45  [WIREPAD_0,8/0,45]  39.25,96.03 90 top
U$285  WIREPAD_0,8/0,45  [WIREPAD_0,8/0,45]  35.83,96.03 90 top
U$286  WIREPAD_0,8/0,45  [WIREPAD_0,8/0,45]  35.3,94.9 90 top
U$287  WIREPAD_0,8/0,45  [WIREPAD_0,8/0,45]  35.8,93.78 90 top
U$288  LPS22HB_HLGA  [LPS22HB_HLGA]  37.5,94.9 270 top
U$289  WIREPAD_0,8/0,45  [WIREPAD_0,8/0,45]  50.26,5.79 90 top
U$290  WIREPAD_0,8/0,45  [WIREPAD_0,8/0,45]  50.25,8.03 90 top
U$291  WIREPAD_0,8/0,45  [WIREPAD_0,8/0,45]  46.83,8.03 90 top
U$292  WIREPAD_0,8/0,45  [WIREPAD_0,8/0,45]  46.3,6.9 90 top
U$293  WIREPAD_0,8/0,45  [WIREPAD_0,8/0,45]  46.8,5.79 90 top
U$294  LPS22HB_HLGA  [LPS22HB_HLGA]  48.5,6.9 270 top
U$295  WIREPAD_0,8/0,45  [WIREPAD_0,8/0,45]  50.26,13.79 90 top
U$296  WIREPAD_0,8/0,45  [WIREPAD_0,8/0,45]  50.25,16.03 90 top
U$297  WIREPAD_0,8/0,45  [WIREPAD_0,8/0,45]  46.83,16.03 90 top
U$298  WIREPAD_0,8/0,45  [WIREPAD_0,8/0,45]  46.3,14.9 90 top
U$299  WIREPAD_0,8/0,45  [WIREPAD_0,8/0,45]  46.8,13.79 90 top
U$300  LPS22HB_HLGA  [LPS22HB_HLGA]  48.5,14.9 270 top
U$301  WIREPAD_0,8/0,45  [WIREPAD_0,8/0,45]  50.26,21.79 90 top
U$302  WIREPAD_0,8/0,45  [WIREPAD_0,8/0,45]  50.25,24.03 90 top
U$303  WIREPAD_0,8/0,45  [WIREPAD_0,8/0,45]  46.83,24.03 90 top
U$304  WIREPAD_0,8/0,45  [WIREPAD_0,8/0,45]  46.3,22.9 90 top
U$305  WIREPAD_0,8/0,45  [WIREPAD_0,8/0,45]  46.8,21.79 90 top
U$306  LPS22HB_HLGA  [LPS22HB_HLGA]  48.5,22.9 270 top
U$307  WIREPAD_0,8/0,45  [WIREPAD_0,8/0,45]  50.26,29.79 90 top
U$308  WIREPAD_0,8/0,45  [WIREPAD_0,8/0,45]  50.25,32.03 90 top
U$309  WIREPAD_0,8/0,45  [WIREPAD_0,8/0,45]  46.83,32.03 90 top
U$310  WIREPAD_0,8/0,45  [WIREPAD_0,8/0,45]  46.3,30.9 90 top
U$311  WIREPAD_0,8/0,45  [WIREPAD_0,8/0,45]  46.8,29.79 90 top
U$312  LPS22HB_HLGA  [LPS22HB_HLGA]  48.5,30.9 270 top
U$313  WIREPAD_0,8/0,45  [WIREPAD_0,8/0,45]  50.26,37.79 90 top
U$314  WIREPAD_0,8/0,45  [WIREPAD_0,8/0,45]  50.25,40.03 90 top
U$315  WIREPAD_0,8/0,45  [WIREPAD_0,8/0,45]  46.83,40.03 90 top
U$316  WIREPAD_0,8/0,45  [WIREPAD_0,8/0,45]  46.3,38.9 90 top
U$317  WIREPAD_0,8/0,45  [WIREPAD_0,8/0,45]  46.8,37.78 90 top
U$318  LPS22HB_HLGA  [LPS22HB_HLGA]  48.5,38.9 270 top
U$319  WIREPAD_0,8/0,45  [WIREPAD_0,8/0,45]  50.26,45.79 90 top
U$320  WIREPAD_0,8/0,45  [WIREPAD_0,8/0,45]  50.25,48.03 90 top
U$321  WIREPAD_0,8/0,45  [WIREPAD_0,8/0,45]  46.83,48.03 90 top
U$322  WIREPAD_0,8/0,45  [WIREPAD_0,8/0,45]  46.3,46.9 90 top
U$323  WIREPAD_0,8/0,45  [WIREPAD_0,8/0,45]  46.8,45.78 90 top
U$324  LPS22HB_HLGA  [LPS22HB_HLGA]  48.5,46.9 270 top
U$325  WIREPAD_0,8/0,45  [WIREPAD_0,8/0,45]  50.26,53.79 90 top
U$326  WIREPAD_0,8/0,45  [WIREPAD_0,8/0,45]  50.25,56.03 90 top
U$327  WIREPAD_0,8/0,45  [WIREPAD_0,8/0,45]  46.83,56.03 90 top
U$328  WIREPAD_0,8/0,45  [WIREPAD_0,8/0,45]  46.3,54.9 90 top
U$329  WIREPAD_0,8/0,45  [WIREPAD_0,8/0,45]  46.8,53.78 90 top
U$330  LPS22HB_HLGA  [LPS22HB_HLGA]  48.5,54.9 270 top
U$331  WIREPAD_0,8/0,45  [WIREPAD_0,8/0,45]  50.26,61.79 90 top
U$332  WIREPAD_0,8/0,45  [WIREPAD_0,8/0,45]  50.25,64.03 90 top
U$333  WIREPAD_0,8/0,45  [WIREPAD_0,8/0,45]  46.83,64.03 90 top
U$334  WIREPAD_0,8/0,45  [WIREPAD_0,8/0,45]  46.3,62.9 90 top
U$335  WIREPAD_0,8/0,45  [WIREPAD_0,8/0,45]  46.8,61.78 90 top
U$336  LPS22HB_HLGA  [LPS22HB_HLGA]  48.5,62.9 270 top
U$337  WIREPAD_0,8/0,45  [WIREPAD_0,8/0,45]  50.26,69.79 90 top
U$338  WIREPAD_0,8/0,45  [WIREPAD_0,8/0,45]  50.25,72.03 90 top
U$339  WIREPAD_0,8/0,45  [WIREPAD_0,8/0,45]  46.83,72.03 90 top
U$340  WIREPAD_0,8/0,45  [WIREPAD_0,8/0,45]  46.3,70.9 90 top
U$341  WIREPAD_0,8/0,45  [WIREPAD_0,8/0,45]  46.8,69.78 90 top
U$342  LPS22HB_HLGA  [LPS22HB_HLGA]  48.5,70.9 270 top
U$343  WIREPAD_0,8/0,45  [WIREPAD_0,8/0,45]  50.26,77.79 90 top
U$344  WIREPAD_0,8/0,45  [WIREPAD_0,8/0,45]  50.25,80.03 90 top
U$345  WIREPAD_0,8/0,45  [WIREPAD_0,8/0,45]  46.83,80.03 90 top
U$346  WIREPAD_0,8/0,45  [WIREPAD_0,8/0,45]  46.3,78.9 90 top
U$347  WIREPAD_0,8/0,45  [WIREPAD_0,8/0,45]  46.8,77.78 90 top
U$348  LPS22HB_HLGA  [LPS22HB_HLGA]  48.5,78.9 270 top
U$349  WIREPAD_0,8/0,45  [WIREPAD_0,8/0,45]  50.26,85.79 90 top
U$350  WIREPAD_0,8/0,45  [WIREPAD_0,8/0,45]  50.25,88.03 90 top
U$351  WIREPAD_0,8/0,45  [WIREPAD_0,8/0,45]  46.83,88.03 90 top
U$352  WIREPAD_0,8/0,45  [WIREPAD_0,8/0,45]  46.3,86.9 90 top
U$353  WIREPAD_0,8/0,45  [WIREPAD_0,8/0,45]  46.8,85.78 90 top
U$354  LPS22HB_HLGA  [LPS22HB_HLGA]  48.5,86.9 270 top
U$355  WIREPAD_0,8/0,45  [WIREPAD_0,8/0,45]  50.26,93.79 90 top
U$356  WIREPAD_0,8/0,45  [WIREPAD_0,8/0,45]  50.25,96.03 90 top
U$357  WIREPAD_0,8/0,45  [WIREPAD_0,8/0,45]  46.83,96.03 90 top
U$358  WIREPAD_0,8/0,45  [WIREPAD_0,8/0,45]  46.3,94.9 90 top
U$359  WIREPAD_0,8/0,45  [WIREPAD_0,8/0,45]  46.8,93.78 90 top
U$360  LPS22HB_HLGA  [LPS22HB_HLGA]  48.5,94.9 270 top
U$361  WIREPAD_0,8/0,45  [WIREPAD_0,8/0,45]  61.26,5.79 90 top
U$362  WIREPAD_0,8/0,45  [WIREPAD_0,8/0,45]  61.25,8.03 90 top
U$363  WIREPAD_0,8/0,45  [WIREPAD_0,8/0,45]  57.83,8.03 90 top
U$364  WIREPAD_0,8/0,45  [WIREPAD_0,8/0,45]  57.3,6.9 90 top
U$365  WIREPAD_0,8/0,45  [WIREPAD_0,8/0,45]  57.8,5.79 90 top
U$366  LPS22HB_HLGA  [LPS22HB_HLGA]  59.5,6.9 270 top
U$367  WIREPAD_0,8/0,45  [WIREPAD_0,8/0,45]  61.26,13.79 90 top
U$368  WIREPAD_0,8/0,45  [WIREPAD_0,8/0,45]  61.25,16.03 90 top
U$369  WIREPAD_0,8/0,45  [WIREPAD_0,8/0,45]  57.83,16.03 90 top
U$370  WIREPAD_0,8/0,45  [WIREPAD_0,8/0,45]  57.3,14.9 90 top
U$371  WIREPAD_0,8/0,45  [WIREPAD_0,8/0,45]  57.8,13.79 90 top
U$372  LPS22HB_HLGA  [LPS22HB_HLGA]  59.5,14.9 270 top
U$373  WIREPAD_0,8/0,45  [WIREPAD_0,8/0,45]  61.26,21.79 90 top
U$374  WIREPAD_0,8/0,45  [WIREPAD_0,8/0,45]  61.25,24.03 90 top
U$375  WIREPAD_0,8/0,45  [WIREPAD_0,8/0,45]  57.83,24.03 90 top
U$376  WIREPAD_0,8/0,45  [WIREPAD_0,8/0,45]  57.3,22.9 90 top
U$377  WIREPAD_0,8/0,45  [WIREPAD_0,8/0,45]  57.8,21.79 90 top
U$378  LPS22HB_HLGA  [LPS22HB_HLGA]  59.5,22.9 270 top
U$379  WIREPAD_0,8/0,45  [WIREPAD_0,8/0,45]  61.26,29.79 90 top
U$380  WIREPAD_0,8/0,45  [WIREPAD_0,8/0,45]  61.25,32.03 90 top
U$381  WIREPAD_0,8/0,45  [WIREPAD_0,8/0,45]  57.83,32.03 90 top
U$382  WIREPAD_0,8/0,45  [WIREPAD_0,8/0,45]  57.3,30.9 90 top
U$383  WIREPAD_0,8/0,45  [WIREPAD_0,8/0,45]  57.8,29.79 90 top
U$384  LPS22HB_HLGA  [LPS22HB_HLGA]  59.5,30.9 270 top
U$385  WIREPAD_0,8/0,45  [WIREPAD_0,8/0,45]  61.26,37.79 90 top
U$386  WIREPAD_0,8/0,45  [WIREPAD_0,8/0,45]  61.25,40.03 90 top
U$387  WIREPAD_0,8/0,45  [WIREPAD_0,8/0,45]  57.83,40.03 90 top
U$388  WIREPAD_0,8/0,45  [WIREPAD_0,8/0,45]  57.3,38.9 90 top
U$389  WIREPAD_0,8/0,45  [WIREPAD_0,8/0,45]  57.8,37.78 90 top
U$390  LPS22HB_HLGA  [LPS22HB_HLGA]  59.5,38.9 270 top
U$391  WIREPAD_0,8/0,45  [WIREPAD_0,8/0,45]  61.26,45.79 90 top
U$392  WIREPAD_0,8/0,45  [WIREPAD_0,8/0,45]  61.25,48.03 90 top
U$393  WIREPAD_0,8/0,45  [WIREPAD_0,8/0,45]  57.83,48.03 90 top
U$394  WIREPAD_0,8/0,45  [WIREPAD_0,8/0,45]  57.3,46.9 90 top
U$395  WIREPAD_0,8/0,45  [WIREPAD_0,8/0,45]  57.8,45.78 90 top
U$396  LPS22HB_HLGA  [LPS22HB_HLGA]  59.5,46.9 270 top
U$397  WIREPAD_0,8/0,45  [WIREPAD_0,8/0,45]  61.26,53.79 90 top
U$398  WIREPAD_0,8/0,45  [WIREPAD_0,8/0,45]  61.25,56.03 90 top
U$399  WIREPAD_0,8/0,45  [WIREPAD_0,8/0,45]  57.83,56.03 90 top
U$400  WIREPAD_0,8/0,45  [WIREPAD_0,8/0,45]  57.3,54.9 90 top
U$401  WIREPAD_0,8/0,45  [WIREPAD_0,8/0,45]  57.8,53.78 90 top
U$402  LPS22HB_HLGA  [LPS22HB_HLGA]  59.5,54.9 270 top
U$403  WIREPAD_0,8/0,45  [WIREPAD_0,8/0,45]  61.26,61.79 90 top
U$404  WIREPAD_0,8/0,45  [WIREPAD_0,8/0,45]  61.25,64.03 90 top
U$405  WIREPAD_0,8/0,45  [WIREPAD_0,8/0,45]  57.83,64.03 90 top
U$406  WIREPAD_0,8/0,45  [WIREPAD_0,8/0,45]  57.3,62.9 90 top
U$407  WIREPAD_0,8/0,45  [WIREPAD_0,8/0,45]  57.8,61.78 90 top
U$408  LPS22HB_HLGA  [LPS22HB_HLGA]  59.5,62.9 270 top
U$409  WIREPAD_0,8/0,45  [WIREPAD_0,8/0,45]  61.26,69.79 90 top
U$410  WIREPAD_0,8/0,45  [WIREPAD_0,8/0,45]  61.25,72.03 90 top
U$411  WIREPAD_0,8/0,45  [WIREPAD_0,8/0,45]  57.83,72.03 90 top
U$412  WIREPAD_0,8/0,45  [WIREPAD_0,8/0,45]  57.3,70.9 90 top
U$413  WIREPAD_0,8/0,45  [WIREPAD_0,8/0,45]  57.8,69.78 90 top
U$414  LPS22HB_HLGA  [LPS22HB_HLGA]  59.5,70.9 270 top
U$415  WIREPAD_0,8/0,45  [WIREPAD_0,8/0,45]  61.26,77.79 90 top
U$416  WIREPAD_0,8/0,45  [WIREPAD_0,8/0,45]  61.25,80.03 90 top
U$417  WIREPAD_0,8/0,45  [WIREPAD_0,8/0,45]  57.83,80.03 90 top
U$418  WIREPAD_0,8/0,45  [WIREPAD_0,8/0,45]  57.3,78.9 90 top
U$419  WIREPAD_0,8/0,45  [WIREPAD_0,8/0,45]  57.8,77.78 90 top
U$420  LPS22HB_HLGA  [LPS22HB_HLGA]  59.5,78.9 270 top
U$421  WIREPAD_0,8/0,45  [WIREPAD_0,8/0,45]  61.26,85.79 90 top
U$422  WIREPAD_0,8/0,45  [WIREPAD_0,8/0,45]  61.25,88.03 90 top
U$423  WIREPAD_0,8/0,45  [WIREPAD_0,8/0,45]  57.83,88.03 90 top
U$424  WIREPAD_0,8/0,45  [WIREPAD_0,8/0,45]  57.3,86.9 90 top
U$425  WIREPAD_0,8/0,45  [WIREPAD_0,8/0,45]  57.8,85.78 90 top
U$426  LPS22HB_HLGA  [LPS22HB_HLGA]  59.5,86.9 270 top
U$427  WIREPAD_0,8/0,45  [WIREPAD_0,8/0,45]  61.26,93.79 90 top
U$428  WIREPAD_0,8/0,45  [WIREPAD_0,8/0,45]  61.25,96.03 90 top
U$429  WIREPAD_0,8/0,45  [WIREPAD_0,8/0,45]  57.83,96.03 90 top
U$430  WIREPAD_0,8/0,45  [WIREPAD_0,8/0,45]  57.3,94.9 90 top
U$431  WIREPAD_0,8/0,45  [WIREPAD_0,8/0,45]  57.8,93.78 90 top
U$432  LPS22HB_HLGA  [LPS22HB_HLGA]  59.5,94.9 270 top
U$433  WIREPAD_0,8/0,45  [WIREPAD_0,8/0,45]  71.26,5.79 90 top
U$434  WIREPAD_0,8/0,45  [WIREPAD_0,8/0,45]  71.25,8.03 90 top
U$435  WIREPAD_0,8/0,45  [WIREPAD_0,8/0,45]  67.83,8.03 90 top
U$436  WIREPAD_0,8/0,45  [WIREPAD_0,8/0,45]  67.3,6.9 90 top
U$437  WIREPAD_0,8/0,45  [WIREPAD_0,8/0,45]  67.8,5.79 90 top
U$438  LPS22HB_HLGA  [LPS22HB_HLGA]  69.5,6.9 270 top
U$439  WIREPAD_0,8/0,45  [WIREPAD_0,8/0,45]  71.26,13.79 90 top
U$440  WIREPAD_0,8/0,45  [WIREPAD_0,8/0,45]  71.25,16.03 90 top
U$441  WIREPAD_0,8/0,45  [WIREPAD_0,8/0,45]  67.83,16.03 90 top
U$442  WIREPAD_0,8/0,45  [WIREPAD_0,8/0,45]  67.3,14.9 90 top
U$443  WIREPAD_0,8/0,45  [WIREPAD_0,8/0,45]  67.8,13.79 90 top
U$444  LPS22HB_HLGA  [LPS22HB_HLGA]  69.5,14.9 270 top
U$445  WIREPAD_0,8/0,45  [WIREPAD_0,8/0,45]  71.26,21.79 90 top
U$446  WIREPAD_0,8/0,45  [WIREPAD_0,8/0,45]  71.25,24.03 90 top
U$447  WIREPAD_0,8/0,45  [WIREPAD_0,8/0,45]  67.83,24.03 90 top
U$448  WIREPAD_0,8/0,45  [WIREPAD_0,8/0,45]  67.3,22.9 90 top
U$449  WIREPAD_0,8/0,45  [WIREPAD_0,8/0,45]  67.8,21.79 90 top
U$450  LPS22HB_HLGA  [LPS22HB_HLGA]  69.5,22.9 270 top
U$451  WIREPAD_0,8/0,45  [WIREPAD_0,8/0,45]  71.26,29.79 90 top
U$452  WIREPAD_0,8/0,45  [WIREPAD_0,8/0,45]  71.25,32.03 90 top
U$453  WIREPAD_0,8/0,45  [WIREPAD_0,8/0,45]  67.83,32.03 90 top
U$454  WIREPAD_0,8/0,45  [WIREPAD_0,8/0,45]  67.3,30.9 90 top
U$455  WIREPAD_0,8/0,45  [WIREPAD_0,8/0,45]  67.8,29.79 90 top
U$456  LPS22HB_HLGA  [LPS22HB_HLGA]  69.5,30.9 270 top
U$457  WIREPAD_0,8/0,45  [WIREPAD_0,8/0,45]  71.26,37.79 90 top
U$458  WIREPAD_0,8/0,45  [WIREPAD_0,8/0,45]  71.25,40.03 90 top
U$459  WIREPAD_0,8/0,45  [WIREPAD_0,8/0,45]  67.83,40.03 90 top
U$460  WIREPAD_0,8/0,45  [WIREPAD_0,8/0,45]  67.3,38.9 90 top
U$461  WIREPAD_0,8/0,45  [WIREPAD_0,8/0,45]  67.8,37.78 90 top
U$462  LPS22HB_HLGA  [LPS22HB_HLGA]  69.5,38.9 270 top
U$463  WIREPAD_0,8/0,45  [WIREPAD_0,8/0,45]  71.26,45.79 90 top
U$464  WIREPAD_0,8/0,45  [WIREPAD_0,8/0,45]  71.25,48.03 90 top
U$465  WIREPAD_0,8/0,45  [WIREPAD_0,8/0,45]  67.83,48.03 90 top
U$466  WIREPAD_0,8/0,45  [WIREPAD_0,8/0,45]  67.3,46.9 90 top
U$467  WIREPAD_0,8/0,45  [WIREPAD_0,8/0,45]  67.8,45.78 90 top
U$468  LPS22HB_HLGA  [LPS22HB_HLGA]  69.5,46.9 270 top
U$469  WIREPAD_0,8/0,45  [WIREPAD_0,8/0,45]  71.26,53.79 90 top
U$470  WIREPAD_0,8/0,45  [WIREPAD_0,8/0,45]  71.25,56.03 90 top
U$471  WIREPAD_0,8/0,45  [WIREPAD_0,8/0,45]  67.83,56.03 90 top
U$472  WIREPAD_0,8/0,45  [WIREPAD_0,8/0,45]  67.3,54.9 90 top
U$473  WIREPAD_0,8/0,45  [WIREPAD_0,8/0,45]  67.8,53.78 90 top
U$474  LPS22HB_HLGA  [LPS22HB_HLGA]  69.5,54.9 270 top
U$475  WIREPAD_0,8/0,45  [WIREPAD_0,8/0,45]  71.26,61.79 90 top
U$476  WIREPAD_0,8/0,45  [WIREPAD_0,8/0,45]  71.25,64.03 90 top
U$477  WIREPAD_0,8/0,45  [WIREPAD_0,8/0,45]  67.83,64.03 90 top
U$478  WIREPAD_0,8/0,45  [WIREPAD_0,8/0,45]  67.3,62.9 90 top
U$479  WIREPAD_0,8/0,45  [WIREPAD_0,8/0,45]  67.8,61.78 90 top
U$480  LPS22HB_HLGA  [LPS22HB_HLGA]  69.5,62.9 270 top
U$481  WIREPAD_0,8/0,45  [WIREPAD_0,8/0,45]  71.26,69.79 90 top
U$482  WIREPAD_0,8/0,45  [WIREPAD_0,8/0,45]  71.25,72.03 90 top
U$483  WIREPAD_0,8/0,45  [WIREPAD_0,8/0,45]  67.83,72.03 90 top
U$484  WIREPAD_0,8/0,45  [WIREPAD_0,8/0,45]  67.3,70.9 90 top
U$485  WIREPAD_0,8/0,45  [WIREPAD_0,8/0,45]  67.8,69.78 90 top
U$486  LPS22HB_HLGA  [LPS22HB_HLGA]  69.5,70.9 270 top
U$487  WIREPAD_0,8/0,45  [WIREPAD_0,8/0,45]  71.26,77.79 90 top
U$488  WIREPAD_0,8/0,45  [WIREPAD_0,8/0,45]  71.25,80.03 90 top
U$489  WIREPAD_0,8/0,45  [WIREPAD_0,8/0,45]  67.83,80.03 90 top
U$490  WIREPAD_0,8/0,45  [WIREPAD_0,8/0,45]  67.3,78.9 90 top
U$491  WIREPAD_0,8/0,45  [WIREPAD_0,8/0,45]  67.8,77.78 90 top
U$492  LPS22HB_HLGA  [LPS22HB_HLGA]  69.5,78.9 270 top
U$493  WIREPAD_0,8/0,45  [WIREPAD_0,8/0,45]  71.26,85.79 90 top
U$494  WIREPAD_0,8/0,45  [WIREPAD_0,8/0,45]  71.25,88.03 90 top
U$495  WIREPAD_0,8/0,45  [WIREPAD_0,8/0,45]  67.83,88.03 90 top
U$496  WIREPAD_0,8/0,45  [WIREPAD_0,8/0,45]  67.3,86.9 90 top
U$497  WIREPAD_0,8/0,45  [WIREPAD_0,8/0,45]  67.8,85.78 90 top
U$498  LPS22HB_HLGA  [LPS22HB_HLGA]  69.5,86.9 270 top
U$499  WIREPAD_0,8/0,45  [WIREPAD_0,8/0,45]  71.26,93.79 90 top
U$500  WIREPAD_0,8/0,45  [WIREPAD_0,8/0,45]  71.25,96.03 90 top
U$501  WIREPAD_0,8/0,45  [WIREPAD_0,8/0,45]  67.83,96.03 90 top
U$502  WIREPAD_0,8/0,45  [WIREPAD_0,8/0,45]  67.3,94.9 90 top
U$503  WIREPAD_0,8/0,45  [WIREPAD_0,8/0,45]  67.8,93.78 90 top
U$504  LPS22HB_HLGA  [LPS22HB_HLGA]  69.5,94.9 270 top
U$505  WIREPAD_0,8/0,45  [WIREPAD_0,8/0,45]  82.26,5.79 90 top
U$506  WIREPAD_0,8/0,45  [WIREPAD_0,8/0,45]  82.25,8.03 90 top
U$507  WIREPAD_0,8/0,45  [WIREPAD_0,8/0,45]  78.83,8.03 90 top
U$508  WIREPAD_0,8/0,45  [WIREPAD_0,8/0,45]  78.3,6.9 90 top
U$509  WIREPAD_0,8/0,45  [WIREPAD_0,8/0,45]  78.8,5.79 90 top
U$510  LPS22HB_HLGA  [LPS22HB_HLGA]  80.5,6.9 270 top
U$511  WIREPAD_0,8/0,45  [WIREPAD_0,8/0,45]  82.26,13.79 90 top
U$512  WIREPAD_0,8/0,45  [WIREPAD_0,8/0,45]  82.25,16.03 90 top
U$513  WIREPAD_0,8/0,45  [WIREPAD_0,8/0,45]  78.83,16.03 90 top
U$514  WIREPAD_0,8/0,45  [WIREPAD_0,8/0,45]  78.3,14.9 90 top
U$515  WIREPAD_0,8/0,45  [WIREPAD_0,8/0,45]  78.8,13.79 90 top
U$516  LPS22HB_HLGA  [LPS22HB_HLGA]  80.5,14.9 270 top
U$517  WIREPAD_0,8/0,45  [WIREPAD_0,8/0,45]  82.26,21.79 90 top
U$518  WIREPAD_0,8/0,45  [WIREPAD_0,8/0,45]  82.25,24.03 90 top
U$519  WIREPAD_0,8/0,45  [WIREPAD_0,8/0,45]  78.83,24.03 90 top
U$520  WIREPAD_0,8/0,45  [WIREPAD_0,8/0,45]  78.3,22.9 90 top
U$521  WIREPAD_0,8/0,45  [WIREPAD_0,8/0,45]  78.8,21.79 90 top
U$522  LPS22HB_HLGA  [LPS22HB_HLGA]  80.5,22.9 270 top
U$523  WIREPAD_0,8/0,45  [WIREPAD_0,8/0,45]  82.26,29.79 90 top
U$524  WIREPAD_0,8/0,45  [WIREPAD_0,8/0,45]  82.25,32.03 90 top
U$525  WIREPAD_0,8/0,45  [WIREPAD_0,8/0,45]  78.83,32.03 90 top
U$526  WIREPAD_0,8/0,45  [WIREPAD_0,8/0,45]  78.3,30.9 90 top
U$527  WIREPAD_0,8/0,45  [WIREPAD_0,8/0,45]  78.8,29.79 90 top
U$528  LPS22HB_HLGA  [LPS22HB_HLGA]  80.5,30.9 270 top
U$529  WIREPAD_0,8/0,45  [WIREPAD_0,8/0,45]  82.26,37.79 90 top
U$530  WIREPAD_0,8/0,45  [WIREPAD_0,8/0,45]  82.25,40.03 90 top
U$531  WIREPAD_0,8/0,45  [WIREPAD_0,8/0,45]  78.83,40.03 90 top
U$532  WIREPAD_0,8/0,45  [WIREPAD_0,8/0,45]  78.3,38.9 90 top
U$533  WIREPAD_0,8/0,45  [WIREPAD_0,8/0,45]  78.8,37.78 90 top
U$534  LPS22HB_HLGA  [LPS22HB_HLGA]  80.5,38.9 270 top
U$535  WIREPAD_0,8/0,45  [WIREPAD_0,8/0,45]  82.26,45.79 90 top
U$536  WIREPAD_0,8/0,45  [WIREPAD_0,8/0,45]  82.25,48.03 90 top
U$537  WIREPAD_0,8/0,45  [WIREPAD_0,8/0,45]  78.83,48.03 90 top
U$538  WIREPAD_0,8/0,45  [WIREPAD_0,8/0,45]  78.3,46.9 90 top
U$539  WIREPAD_0,8/0,45  [WIREPAD_0,8/0,45]  78.8,45.78 90 top
U$540  LPS22HB_HLGA  [LPS22HB_HLGA]  80.5,46.9 270 top
U$541  WIREPAD_0,8/0,45  [WIREPAD_0,8/0,45]  82.26,53.79 90 top
U$542  WIREPAD_0,8/0,45  [WIREPAD_0,8/0,45]  82.25,56.03 90 top
U$543  WIREPAD_0,8/0,45  [WIREPAD_0,8/0,45]  78.83,56.03 90 top
U$544  WIREPAD_0,8/0,45  [WIREPAD_0,8/0,45]  78.3,54.9 90 top
U$545  WIREPAD_0,8/0,45  [WIREPAD_0,8/0,45]  78.8,53.78 90 top
U$546  LPS22HB_HLGA  [LPS22HB_HLGA]  80.5,54.9 270 top
U$547  WIREPAD_0,8/0,45  [WIREPAD_0,8/0,45]  82.26,61.79 90 top
U$548  WIREPAD_0,8/0,45  [WIREPAD_0,8/0,45]  82.25,64.03 90 top
U$549  WIREPAD_0,8/0,45  [WIREPAD_0,8/0,45]  78.83,64.03 90 top
U$550  WIREPAD_0,8/0,45  [WIREPAD_0,8/0,45]  78.3,62.9 90 top
U$551  WIREPAD_0,8/0,45  [WIREPAD_0,8/0,45]  78.8,61.78 90 top
U$552  LPS22HB_HLGA  [LPS22HB_HLGA]  80.5,62.9 270 top
U$553  WIREPAD_0,8/0,45  [WIREPAD_0,8/0,45]  82.26,69.79 90 top
U$554  WIREPAD_0,8/0,45  [WIREPAD_0,8/0,45]  82.25,72.03 90 top
U$555  WIREPAD_0,8/0,45  [WIREPAD_0,8/0,45]  78.83,72.03 90 top
U$556  WIREPAD_0,8/0,45  [WIREPAD_0,8/0,45]  78.3,70.9 90 top
U$557  WIREPAD_0,8/0,45  [WIREPAD_0,8/0,45]  78.8,69.78 90 top
U$558  LPS22HB_HLGA  [LPS22HB_HLGA]  80.5,70.9 270 top
U$559  WIREPAD_0,8/0,45  [WIREPAD_0,8/0,45]  82.26,77.79 90 top
U$560  WIREPAD_0,8/0,45  [WIREPAD_0,8/0,45]  82.25,80.03 90 top
U$561  WIREPAD_0,8/0,45  [WIREPAD_0,8/0,45]  78.83,80.03 90 top
U$562  WIREPAD_0,8/0,45  [WIREPAD_0,8/0,45]  78.3,78.9 90 top
U$563  WIREPAD_0,8/0,45  [WIREPAD_0,8/0,45]  78.8,77.78 90 top
U$564  LPS22HB_HLGA  [LPS22HB_HLGA]  80.5,78.9 270 top
U$565  WIREPAD_0,8/0,45  [WIREPAD_0,8/0,45]  82.26,85.79 90 top
U$566  WIREPAD_0,8/0,45  [WIREPAD_0,8/0,45]  82.25,88.03 90 top
U$567  WIREPAD_0,8/0,45  [WIREPAD_0,8/0,45]  78.83,88.03 90 top
U$568  WIREPAD_0,8/0,45  [WIREPAD_0,8/0,45]  78.3,86.9 90 top
U$569  WIREPAD_0,8/0,45  [WIREPAD_0,8/0,45]  78.8,85.78 90 top
U$570  LPS22HB_HLGA  [LPS22HB_HLGA]  80.5,86.9 270 top
U$571  WIREPAD_0,8/0,45  [WIREPAD_0,8/0,45]  82.26,93.79 90 top
U$572  WIREPAD_0,8/0,45  [WIREPAD_0,8/0,45]  82.25,96.03 90 top
U$573  WIREPAD_0,8/0,45  [WIREPAD_0,8/0,45]  78.83,96.03 90 top
U$574  WIREPAD_0,8/0,45  [WIREPAD_0,8/0,45]  78.3,94.9 90 top
U$575  WIREPAD_0,8/0,45  [WIREPAD_0,8/0,45]  78.8,93.78 90 top
U$576  LPS22HB_HLGA  [LPS22HB_HLGA]  80.5,94.9 270 top
U$577  WIREPAD_0,8/0,45  [WIREPAD_0,8/0,45]  93.26,5.79 90 top
U$578  WIREPAD_0,8/0,45  [WIREPAD_0,8/0,45]  93.25,8.03 90 top
U$579  WIREPAD_0,8/0,45  [WIREPAD_0,8/0,45]  89.83,8.03 90 top
U$580  WIREPAD_0,8/0,45  [WIREPAD_0,8/0,45]  89.3,6.9 90 top
U$581  WIREPAD_0,8/0,45  [WIREPAD_0,8/0,45]  89.8,5.79 90 top
U$582  LPS22HB_HLGA  [LPS22HB_HLGA]  91.5,6.9 270 top
U$583  WIREPAD_0,8/0,45  [WIREPAD_0,8/0,45]  93.26,13.79 90 top
U$584  WIREPAD_0,8/0,45  [WIREPAD_0,8/0,45]  93.25,16.03 90 top
U$585  WIREPAD_0,8/0,45  [WIREPAD_0,8/0,45]  89.83,16.03 90 top
U$586  WIREPAD_0,8/0,45  [WIREPAD_0,8/0,45]  89.3,14.9 90 top
U$587  WIREPAD_0,8/0,45  [WIREPAD_0,8/0,45]  89.8,13.79 90 top
U$588  LPS22HB_HLGA  [LPS22HB_HLGA]  91.5,14.9 270 top
U$589  WIREPAD_0,8/0,45  [WIREPAD_0,8/0,45]  93.26,21.79 90 top
U$590  WIREPAD_0,8/0,45  [WIREPAD_0,8/0,45]  93.25,24.03 90 top
U$591  WIREPAD_0,8/0,45  [WIREPAD_0,8/0,45]  89.83,24.03 90 top
U$592  WIREPAD_0,8/0,45  [WIREPAD_0,8/0,45]  89.3,22.9 90 top
U$593  WIREPAD_0,8/0,45  [WIREPAD_0,8/0,45]  89.8,21.79 90 top
U$594  LPS22HB_HLGA  [LPS22HB_HLGA]  91.5,22.9 270 top
U$595  WIREPAD_0,8/0,45  [WIREPAD_0,8/0,45]  93.26,29.79 90 top
U$596  WIREPAD_0,8/0,45  [WIREPAD_0,8/0,45]  93.25,32.03 90 top
U$597  WIREPAD_0,8/0,45  [WIREPAD_0,8/0,45]  89.83,32.03 90 top
U$598  WIREPAD_0,8/0,45  [WIREPAD_0,8/0,45]  89.3,30.9 90 top
U$599  WIREPAD_0,8/0,45  [WIREPAD_0,8/0,45]  89.8,29.79 90 top
U$600  LPS22HB_HLGA  [LPS22HB_HLGA]  91.5,30.9 270 top
U$601  WIREPAD_0,8/0,45  [WIREPAD_0,8/0,45]  93.26,37.79 90 top
U$602  WIREPAD_0,8/0,45  [WIREPAD_0,8/0,45]  93.25,40.03 90 top
U$603  WIREPAD_0,8/0,45  [WIREPAD_0,8/0,45]  89.83,40.03 90 top
U$604  WIREPAD_0,8/0,45  [WIREPAD_0,8/0,45]  89.3,38.9 90 top
U$605  WIREPAD_0,8/0,45  [WIREPAD_0,8/0,45]  89.8,37.78 90 top
U$606  LPS22HB_HLGA  [LPS22HB_HLGA]  91.5,38.9 270 top
U$607  WIREPAD_0,8/0,45  [WIREPAD_0,8/0,45]  93.26,45.79 90 top
U$608  WIREPAD_0,8/0,45  [WIREPAD_0,8/0,45]  93.25,48.03 90 top
U$609  WIREPAD_0,8/0,45  [WIREPAD_0,8/0,45]  89.83,48.03 90 top
U$610  WIREPAD_0,8/0,45  [WIREPAD_0,8/0,45]  89.3,46.9 90 top
U$611  WIREPAD_0,8/0,45  [WIREPAD_0,8/0,45]  89.8,45.78 90 top
U$612  LPS22HB_HLGA  [LPS22HB_HLGA]  91.5,46.9 270 top
U$613  WIREPAD_0,8/0,45  [WIREPAD_0,8/0,45]  93.26,53.79 90 top
U$614  WIREPAD_0,8/0,45  [WIREPAD_0,8/0,45]  93.25,56.03 90 top
U$615  WIREPAD_0,8/0,45  [WIREPAD_0,8/0,45]  89.83,56.03 90 top
U$616  WIREPAD_0,8/0,45  [WIREPAD_0,8/0,45]  89.3,54.9 90 top
U$617  WIREPAD_0,8/0,45  [WIREPAD_0,8/0,45]  89.8,53.78 90 top
U$618  LPS22HB_HLGA  [LPS22HB_HLGA]  91.5,54.9 270 top
U$619  WIREPAD_0,8/0,45  [WIREPAD_0,8/0,45]  93.26,61.79 90 top
U$620  WIREPAD_0,8/0,45  [WIREPAD_0,8/0,45]  93.25,64.03 90 top
U$621  WIREPAD_0,8/0,45  [WIREPAD_0,8/0,45]  89.83,64.03 90 top
U$622  WIREPAD_0,8/0,45  [WIREPAD_0,8/0,45]  89.3,62.9 90 top
U$623  WIREPAD_0,8/0,45  [WIREPAD_0,8/0,45]  89.8,61.78 90 top
U$624  LPS22HB_HLGA  [LPS22HB_HLGA]  91.5,62.9 270 top
U$625  WIREPAD_0,8/0,45  [WIREPAD_0,8/0,45]  93.26,69.79 90 top
U$626  WIREPAD_0,8/0,45  [WIREPAD_0,8/0,45]  93.25,72.03 90 top
U$627  WIREPAD_0,8/0,45  [WIREPAD_0,8/0,45]  89.83,72.03 90 top
U$628  WIREPAD_0,8/0,45  [WIREPAD_0,8/0,45]  89.3,70.9 90 top
U$629  WIREPAD_0,8/0,45  [WIREPAD_0,8/0,45]  89.8,69.78 90 top
U$630  LPS22HB_HLGA  [LPS22HB_HLGA]  91.5,70.9 270 top
U$631  WIREPAD_0,8/0,45  [WIREPAD_0,8/0,45]  93.26,77.79 90 top
U$632  WIREPAD_0,8/0,45  [WIREPAD_0,8/0,45]  93.25,80.03 90 top
U$633  WIREPAD_0,8/0,45  [WIREPAD_0,8/0,45]  89.83,80.03 90 top
U$634  WIREPAD_0,8/0,45  [WIREPAD_0,8/0,45]  89.3,78.9 90 top
U$635  WIREPAD_0,8/0,45  [WIREPAD_0,8/0,45]  89.8,77.78 90 top
U$636  LPS22HB_HLGA  [LPS22HB_HLGA]  91.5,78.9 270 top
U$637  WIREPAD_0,8/0,45  [WIREPAD_0,8/0,45]  93.26,85.79 90 top
U$638  WIREPAD_0,8/0,45  [WIREPAD_0,8/0,45]  93.25,88.03 90 top
U$639  WIREPAD_0,8/0,45  [WIREPAD_0,8/0,45]  89.83,88.03 90 top
U$640  WIREPAD_0,8/0,45  [WIREPAD_0,8/0,45]  89.3,86.9 90 top
U$641  WIREPAD_0,8/0,45  [WIREPAD_0,8/0,45]  89.8,85.78 90 top
U$642  LPS22HB_HLGA  [LPS22HB_HLGA]  91.5,86.9 270 top
U$643  WIREPAD_0,8/0,45  [WIREPAD_0,8/0,45]  93.26,93.79 90 top
U$644  WIREPAD_0,8/0,45  [WIREPAD_0,8/0,45]  93.25,96.03 90 top
U$645  WIREPAD_0,8/0,45  [WIREPAD_0,8/0,45]  89.83,96.03 90 top
U$646  WIREPAD_0,8/0,45  [WIREPAD_0,8/0,45]  89.3,94.9 90 top
U$647  WIREPAD_0,8/0,45  [WIREPAD_0,8/0,45]  89.8,93.78 90 top
U$648  LPS22HB_HLGA  [LPS22HB_HLGA]  91.5,94.9 270 top

## Library data of the parts
C1-C108 = resistor
U$1 U$12 U$18 U$24 U$30 U$36 U$42 U$48 U$54 U$60 U$66 U$72 U$78 U$84 U$90 U$96 U$102 U$108 U$114 U$120 U$126 U$132 U$138 U$144 U$150 U$156 U$162 U$168 U$174 U$180 U$186 U$192 U$198 U$204 U$210 U$216 U$222 U$228 U$234 U$240 U$246 U$252 U$258 U$264 U$270 U$276 U$282 U$288 U$294 U$300 U$306 U$312 U$318 U$324 U$330 U$336 U$342 U$348 U$354 U$360 U$366 U$372 U$378 U$384 U$390 U$396 U$402 U$408 U$414 U$420 U$426 U$432 U$438 U$444 U$450 U$456 U$462 U$468 U$474 U$480 U$486 U$492 U$498 U$504 U$510 U$516 U$522 U$528 U$534 U$540 U$546 U$552 U$558 U$564 U$570 U$576 U$582 U$588 U$594 U$600 U$606 U$612 U$618 U$624 U$630 U$636 U$642 U$648 = LPS22HB
U$2-U$11 U$13-U$17 U$19-U$23 U$25-U$29 U$31-U$35 U$37-U$41 U$43-U$47 U$49-U$53 U$55-U$59 U$61-U$65 U$67-U$71 U$73-U$77 U$79-U$83 U$85-U$89 U$91-U$95 U$97-U$101 U$103-U$107 U$109-U$113 U$115-U$119 U$121-U$125 U$127-U$131 U$133-U$137 U$139-U$143 U$145-U$149 U$151-U$155 U$157-U$161 U$163-U$167 U$169-U$173 U$175-U$179 U$181-U$185 U$187-U$191 U$193-U$197 U$199-U$203 U$205-U$209 U$211-U$215 U$217-U$221 U$223-U$227 U$229-U$233 U$235-U$239 U$241-U$245 U$247-U$251 U$253-U$257 U$259-U$263 U$265-U$269 U$271-U$275 U$277-U$281 U$283-U$287 U$289-U$293 U$295-U$299 U$301-U$305 U$307-U$311 U$313-U$317 U$319-U$323 U$325-U$329 U$331-U$335 U$337-U$341 U$343-U$347 U$349-U$353 U$355-U$359 U$361-U$365 U$367-U$371 U$373-U$377 U$379-U$383 U$385-U$389 U$391-U$395 U$397-U$401 U$403-U$407 U$409-U$413 U$415-U$419 U$421-U$425 U$427-U$431 U$433-U$437 U$439-U$443 U$445-U$449 U$451-U$455 U$457-U$461 U$463-U$467 U$469-U$473 U$475-U$479 U$481-U$485 U$487-U$491 U$493-U$497 U$499-U$503 U$505-U$509 U$511-U$515 U$517-U$521 U$523-U$527 U$529-U$533 U$535-U$539 U$541-U$545 U$547-U$551 U$553-U$557 U$559-U$563 U$565-U$569 U$571-U$575 U$577-U$581 U$583-U$587 U$589-U$593 U$595-U$599 U$601-U$605 U$607-U$611 U$613-U$617 U$619-U$623 U$625-U$629 U$631-U$635 U$637-U$641 U$643-U$647 = wirepad_08-045